# Altium PCB MicroMod_ATP_CarrierBoard.PcbDoc (part 2 of 2)
Units mil, origin at the board's own origin, x right, y up, seen from the top; angles counter-clockwise.
Board outline 3400 x 2200 mil, 2 copper layers (Top, Bottom); 222 components, 72 nets, 322 pads, 144 vias.
Unrouted connection lines stored in the file: 6.
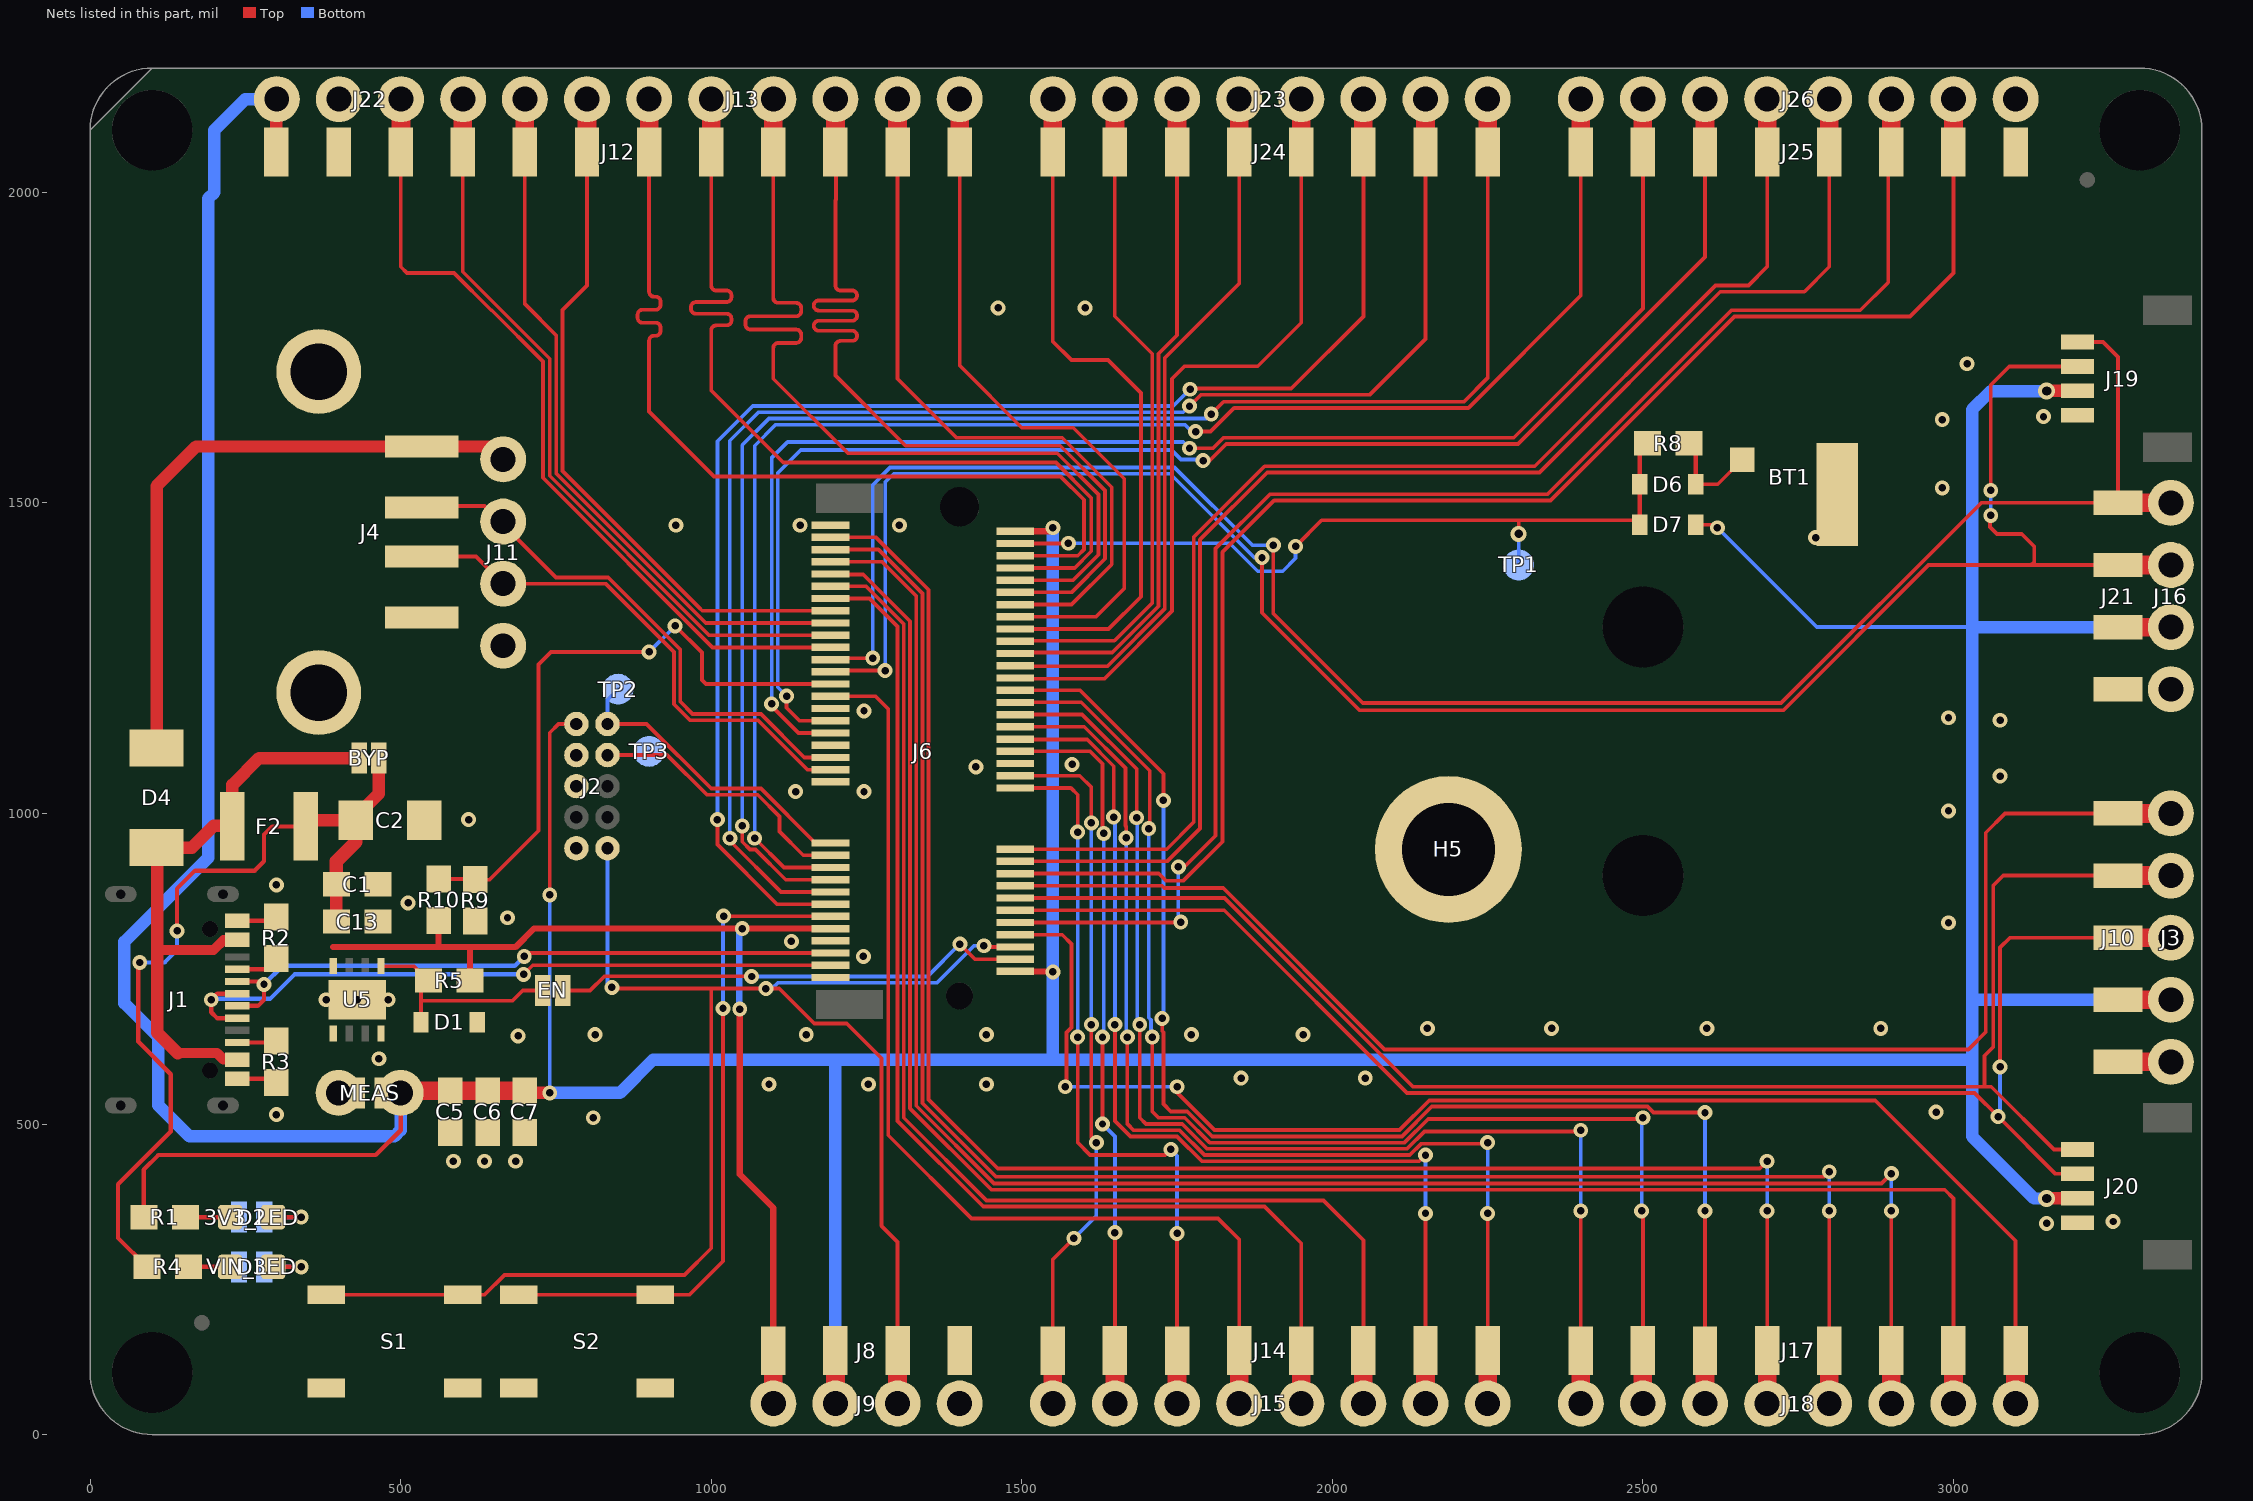
[diagram p2: the nets of this part, all layers, seen from the top]

## Part data
3V3_LED VIN_LED: library part SMT-JUMPER_2_NC_TRACE_SILK, PackageName=SMT-JUMPER_2_NC_TRACE_SILK
BT1: library part ML414H_IV01E, PackageName=ML414H_IV01E
BYP EN: library part SMT-JUMPER_2_NO_SILK, PackageName=SMT-JUMPER_2_NO_SILK
C1 C5 C6 C7 C13 R1 R2 R3 R4 R5 R8 R9 R10: library part 0603, PackageName=0603
C2: library part EIA3216, PackageName=EIA3216
D1 D6 D7: library part SOD-323, PackageName=SOD-323
D2 D3: library part LED-0603, PackageName=LED-0603
D4: library part DO-214BA, PackageName=DO-214BA
F2: library part 1210, PackageName=1210
FD1 FD2 FD3 FD4: library part FIDUCIAL-MICRO, PackageName=FIDUCIAL-MICRO
FRAME1: library part CREATIVE_COMMONS, PackageName=CREATIVE_COMMONS
H5: library part STAND-OFF-REFLOW-M2.5, PackageName=STAND-OFF-REFLOW-M2.5
J1: library part USB-C-16P-2LAYER-PADS, PackageName=USB-C-16P-2LAYER-PADS
J2: library part 2X5-PTH-1.27MM, PackageName=2X5-PTH-1.27MM
J3: library part 1X05_NO_SILK, PackageName=1X05_NO_SILK
J4: library part USB-A-S-SILK-FEMALE, PackageName=USB-A-S-SILK-FEMALE
J6: library part M.2-CONNECTOR-E, PackageName=M.2-CONNECTOR-E
J8 J21: library part 1X04_SMD_VERTICAL_COMBO, PackageName=1X04_SMD_VERTICAL_COMBO
J9 J11 J16 J22: library part 1X04_NO_SILK, PackageName=1X04_NO_SILK
J10: library part 1X05_SMD_VERTICAL_COMBO, PackageName=1X05_SMD_VERTICAL_COMBO
J12: library part 1X12_SMD_COMBINED, PackageName=1X12_SMD_COMBINED
J13 J15 J18 J23 J26: library part 1X08_NO_SILK, PackageName=1X08_NO_SILK
J14 J17 J24 J25: library part 1X08_SMD_COMBINED, PackageName=1X08_SMD_COMBINED
J19 J20: library part JST04_1MM_RA, PackageName=JST04_1MM_RA
LOGO1: library part SFE_LOGO_NAME_FLAME_.1, PackageName=SFE_LOGO_NAME_FLAME_.1
LOGO2 LOGO5 LOGO6 LOGO7 LOGO8: library part QWIIC_5MM, PackageName=QWIIC_5MM
LOGO3: library part OSHW-LOGO-MINI, PackageName=OSHW-LOGO-MINI
LOGO4: library part SFE_LOGO_NAME_FLAME_.2, PackageName=SFE_LOGO_NAME_FLAME_.2
MEAS: library part COMBO-JUMPER_2_NC_TRACE, PackageName=COMBO-JUMPER_2_NC_TRACE
S1 S2: library part TACTILE_SWITCH_SMD_5.2MM, PackageName=TACTILE_SWITCH_SMD_5.2MM
TP1 TP2 TP3: library part PAD.03X.05, PackageName=PAD.03X.05
U5: library part UDFN-8, PackageName=UDFN-8
U$1 U$123: library part #A0#10, PackageName=#A0#10
U$2 U$124: library part #A1#10, PackageName=#A1#10
U$3 U$27 U$46 U$47 U$58 U$89 U$100 U$101 U$102 U$103 U$104 U$105: library part #GND#0, PackageName=#GND#0
U$4 U$120: library part #G0#2, PackageName=#G0#2
U$5: library part #RESET10, PackageName=#RESET10
U$6 U$98: library part #D0#0, PackageName=#D0#0
U$7 U$119: library part #G1#2, PackageName=#G1#2
U$8 U$118: library part #G2#2, PackageName=#G2#2
U$9 U$117: library part #G3#3, PackageName=#G3#3
U$10 U$116: library part #G4#4, PackageName=#G4#4
U$11 U$115: library part #G5#5, PackageName=#G5#5
U$12 U$114: library part #G6#6, PackageName=#G6#6
U$13 U$113: library part #G7#7, PackageName=#G7#7
U$14 U$112: library part #G8#8, PackageName=#G8#8
U$15: library part #G9#9, PackageName=#G9#9
U$16: library part #G10#10, PackageName=#G10#10
U$17 U$111: library part #G11#10, PackageName=#G11#10
U$18 U$121: library part #PWM0#10, PackageName=#PWM0#10
U$19 U$122: library part #PWM1#10, PackageName=#PWM1#10
U$20: library part ##CS1##5178039, PackageName=##CS1##5178039
U$21 U$110: library part ##I2C_INT##10, PackageName=##I2C_INT##10
U$22: library part #CAN_RX#9, PackageName=#CAN_RX#9
U$23 U$97: library part #CAN_TX#10, PackageName=#CAN_TX#10
U$24: library part #CIPO#3, PackageName=#CIPO#3
U$25: library part #COPI#2, PackageName=#COPI#2
U$26: library part #CTS#6, PackageName=#CTS#6
U$28: library part #SCK#2, PackageName=#SCK#2
U$29: library part #I2S_FS#5, PackageName=#I2S_FS#5
U$30: library part #I2S_SDI#5, PackageName=#I2S_SDI#5
U$31: library part #I2S_SDO#5, PackageName=#I2S_SDO#5
U$32: library part #MCLK#4, PackageName=#MCLK#4
U$33: library part #RTS#5, PackageName=#RTS#5
U$34: library part #RX#8, PackageName=#RX#8
U$35: library part #TX#7, PackageName=#TX#7
U$36: library part #DAT1#5178039, PackageName=#DAT1#5178039
U$37 U$125: library part ##RESET##7, PackageName=##RESET##7
U$38 U$60 U$61 U$70 U$88 U$106 U$107 U$126: library part #3V3#1, PackageName=#3V3#1
U$39: library part #BYP#8, PackageName=#BYP#8
U$40 U$128: library part #HOST_D##9, PackageName=#HOST_D##9
U$41 U$129: library part #HOST_D##10, PackageName=#HOST_D##10
U$42 U$132: library part #MEAS#10, PackageName=#MEAS#10
U$43: library part BOOT10, PackageName=BOOT10
U$44 U$108: library part #SDA#4, PackageName=#SDA#4
U$45 U$127: library part #VIN#6, PackageName=#VIN#6
U$48: library part #EN#0, PackageName=#EN#0
U$49 U$109: library part #SCL#5, PackageName=#SCL#5
U$50 U$146: library part #VHOST#0, PackageName=#VHOST#0
U$51 U$131: library part #SWD#10, PackageName=#SWD#10
U$52: library part #I2S_CLK#5, PackageName=#I2S_CLK#5
U$53: library part #DAT2#5178039, PackageName=#DAT2#5178039
U$54: library part #CIPO1#5178039, PackageName=#CIPO1#5178039
U$55: library part 22229, PackageName=22229
U$56: library part ##CIPO1##DAT0#5178038, PackageName=##CIPO1##DAT0#5178038
U$57 U$75: library part #COPI1#2, PackageName=#COPI1#2
U$59: library part ##CS##0, PackageName=##CS##0
U$62: library part ATP0, PackageName=ATP0
U$63 U$76: library part #RX2#3, PackageName=#RX2#3
U$64 U$80: library part #TX2#2, PackageName=#TX2#2
U$65 U$78: library part #SCL1#3, PackageName=#SCL1#3
U$66 U$79: library part #SDA1#3, PackageName=#SDA1#3
U$67 U$77: library part #SCK1#2, PackageName=#SCK1#2
U$68: library part VIN3, PackageName=VIN3
U$69: library part 3V34, PackageName=3V34
U$71: library part I2C4, PackageName=I2C4
U$72: library part I2C14, PackageName=I2C14
U$73: library part ATP_CARRIER_BOARD1, PackageName=ATP_CARRIER_BOARD1
U$81: library part ##CS##5178037, PackageName=##CS##5178037
U$82: library part #DAT2#5, PackageName=#DAT2#5
U$83: library part #DAT1#5, PackageName=#DAT1#5
U$84: library part ##CS1##DAT3#5178037, PackageName=##CS1##DAT3#5178037
U$85: library part #COPI#4, PackageName=#COPI#4
U$86: library part #SCK#4, PackageName=#SCK#4
U$87: library part #MCLK#6, PackageName=#MCLK#6
U$90: library part #I2S_FS#7, PackageName=#I2S_FS#7
U$91: library part #I2S_CLK#7, PackageName=#I2S_CLK#7
U$92: library part #RTS#7, PackageName=#RTS#7
U$93: library part #CTS#8, PackageName=#CTS#8
U$94: library part #TX#9, PackageName=#TX#9
U$95: library part #RX#10, PackageName=#RX#10
U$96: library part #CAN_RX#10, PackageName=#CAN_RX#10
U$99 U$145: library part D10, PackageName=D10
U$133: library part #VIN_LED#10, PackageName=#VIN_LED#10
U$134: library part #3V3_LED#10, PackageName=#3V3_LED#10
U$135: library part #G9#ADC##CAM_HSYNC#9, PackageName=#G9#ADC##CAM_HSYNC#9
U$136: library part #G10#ADC##CAM_VSYNC#10, PackageName=#G10#ADC##CAM_VSYNC#10
U$137: library part #I2S_SDI#CAM_PCLK#7, PackageName=#I2S_SDI#CAM_PCLK#7
U$138: library part #I2S_SDO#CAM_MCLK#7, PackageName=#I2S_SDO#CAM_MCLK#7
U$139 U$141 U$142 U$143: library part MOUNT10, PackageName=MOUNT10
U$140: library part MICROMOD_MI_LOGO_1, PackageName=MICROMOD_MI_LOGO_1
U$144: library part MICROMOD_LOGO_1, PackageName=MICROMOD_LOGO_1
U$147: library part #CIPO#5178038, PackageName=#CIPO#5178038
H1 H2 H3 H4 H6 H7: PackageName=STAND-OFF

## Free pads (board coordinates)
  round 130 hole 130 unplated: MH1(100,100) MH1(100,2100) MH1(2500,900) MH1(2500,1300) MH1(3300,100) MH1(3300,2100)
  round 25.59 hole 25.59 unplated: MH1(193.11,813.78) MH2(193.11,586.22)
  round 43.31 hole 43.31 unplated: MH1(1400,706.3)
  round 62.99 hole 62.99 unplated: MH2(1400,1493.7)

## Via types
v1: diameter 24/24 (per signal layer), hole 12, Top to Bottom, 141 vias
v2: diameter 27/27 (per signal layer), hole 15, Top to Bottom, 2 vias
v3: diameter 25.78/25.78 (per signal layer), hole 13.78, Top to Bottom, 1 vias

## Nets (pads, with @x,y where several pads share a name; then routed paths per layer and width w, separated by ;. In a path a pad name is that pad's centre, name@x,y a point inside that pad or via, vN(x,y) a via of type N, cw(c..) or ccw(c..) an arc to the next point about the centre after c; other vN are vias at no path point)
3.3V: C5.1 C6.1 C7.1 D7.A J2.1 J3.4 J6.2 J6.74 J8.3 J9.2 J10.4 J12.1 J16.3 J19.2 J20.2 J21.3 J22.1 MEAS.2 MEAS.4 R1.2 | length 10630.1
  Top w6: v1(740,869) 740,1130 754,1144 J2.1@783,1144 ; D7.A@2585.28,1465 2615,1465 v1(2620,1460)
  Top w7: R1.2@86.54,350 86.54,426.54 110,450 460,450 500,490 MEAS.4@500,550 MEAS.2@470,550
  Top w10: J6.2@1489.57,745.67 1549.33,745.67 v1(1550,745) ; J6.74@1489.57,1454.33 1544.33,1454.33 v1(1550,1460)
  Top w20: J12.1@300,2064.96 300,2149.41 J22.1@300.59,2150 ; C7.1@700,553.46 703.46,550 v1(740,550) ; v2(3150,380) 3150.32,380.32 J20.2@3200,380.31 ; v2(3150,1680) 3150.32,1680.32 J19.2@3200,1680.31
  Top w30: MEAS.4@500,550 503.46,553.46 C5.1@580,553.46 C6.1@640,553.46 C7.1@700,553.46 ; J9.2@1200,50 J8.3@1200,135.04 ; J21.3@3264.96,1300 J16.3@3350,1300 ; J10.4@3265.04,700 J3.4@3350,700
  Bottom w6: v1(740,550) v1(740,869) ; v1(2620,1460) 2780,1300 3030,1300
  Bottom w20: J22.1@300.59,2150 250,2150 200,2100 200,2000 190,1990 190,928.36 55,793.36 55,694.64 110,639.64 110,530 160,480 490,480 500,490 MEAS.4@500,550 ; v1(740,550) 853,550 906.46,603.46 1200,603.46 ; J9.2@1200,50 1200,603.46 ; v1(1550,1460) v1(1550,745) 1550,603.46 ; v2(3150,380) 3130,380 3030,480 3030,603.46 ; v2(3150,1680) 3060,1680 3030,1650 3030,1300 ; J3.4@3350,700 3030,700 ; J16.3@3350,1300 3030,1300 ; 1200,603.46 1550,603.46 ; 1550,603.46 3030,603.46 ; 3030,603.46 3030,700 ; 3030,700 3030,1300
3.3V_EN: D1.C EN.1 R5.1 U5.5 | length 364.9
  Top w6: U5.5@468.39,754.13 521.4,754.13 R5.1@537.77,737.77 ; D1.C@532.72,664 532.72,698 ; R5.1@544.54,731 R5.1@537.77,737.77 ; EN.1@729,715 696.68,715 680,698.32 533.04,698.32 532.72,698 ; 532.72,698 532.72,732.72 R5.1@537.77,737.77
!BOOT!: J6.11 S2.3 S2.4 | length 1079.8
  Top w6: S2.4@690,225 S2.3@910,225 965,225 1019,279 v1(1019,686) ; v1(1020,834.57) 1192.01,834.57 J6.11@1192.32,834.25
  Bottom w6: v1(1019,686) 1019,833.57 v1(1020,834.57)
!CS1!/DAT3: J6.70 J12.7 J13.6 | length 1625
  Top w6: J12.7@900,2050 900,1840 ccw(c908,1840) 908,1832 910.51,1832 cw(c910.51,1824) 918.51,1824 918.51,1819.03 cw(c910.51,1819.03) 910.51,1811.03 889.49,1811.03 ccw(c889.49,1803.03) 881.49,1803.03 881.49,1798.06 ccw(c889.49,1798.06) 889.49,1790.06 910.51,1790.06 cw(c910.51,1782.06) 918.51,1782.06 918.51,1777.1 cw(c910.51,1777.1) 910.51,1769.1 908,1769.1 ccw(c908,1761.1) 900,1761.1 900,1647 1004.5,1542.5 1562.5,1542.5 1600,1505 1600,1425 1589.96,1414.96 J6.70@1489.57,1414.96 ; J12.7@900,2064.96 J13.6@900,2150
  Top w30: J12.7@900,2050 J13.6@900,2150
!CS!: J6.55 J12.3 J22.3 | length 1411.3
  Top w6: J12.3@500,2050 500,1880 510,1870 585.86,1870 645.86,1810 646.72,1810 729,1727.72 729,1540.46 1002.13,1267.32 J6.55@1192.32,1267.32 ; J12.3@500,2064.96 500,2149.41 J22.3@500.59,2150
  Top w30: J12.3@500,2050 500.59,2050.59 J22.3@500.59,2150
!RESET: J2.10 J6.6 J8.2 J9.3 S1.3 S1.4 | length 2874.9
  Top w6: S1.4@380,225 S1.3@600,225 635.1,225 667.1,257 957,257 1000,300 1000,718 ; v1(840,720) 842,718 1000,718 ; J8.2@1300,135.04 1300,150 1300,310 1274,336 1274,606 1218.1,661.9 1165.8,661.9 1109.7,718 v1(1088,718) 1000,718 ; v1(1439,787) 1440.96,785.04 J6.6@1489.57,785.04
  Top w20: J9.3@1300,50 J8.2@1300,150
  Top w30: J9.3@1300,50 J8.2@1300,135.04
  Bottom w6: J2.10@833,944 833,727 v1(840,720) ; v1(1088,718) 1098,718 1107.51,727.51 1363.51,727.51 1423,787 v1(1439,787)
A0: J6.34 J14.8 J15.8 | length 1154.6
  Top w6: J6.34@1489.57,1060.63 1593.51,1060.63 1612.07,1042.07 1612.07,984.84 v1(1612,984.77) ; J14.8@1550,134.96 1550,282 v1(1584,316) ; v1(1612,660) 1612,478 v1(1620,470)
  Top w30: J15.8@1550,50 J14.8@1550,134.96
  Bottom w6: v1(1584,316) 1620,352 v1(1620,470) ; v1(1612,660) v1(1612,984.77)
A1: J6.38 J14.7 J15.7 | length 1188.7
  Top w6: J6.38@1489.57,1100 1610,1100 1630,1080 1630,970 v1(1632,968) ; v1(1630,500) v1(1630,640) ; J14.7@1650,135.04 v1(1650,325)
  Top w30: J15.7@1650,50 J14.7@1650,135.04
  Bottom w6: v1(1630,500) 1650,480 v1(1650,325) ; v1(1630,640) 1632,642 v1(1632,968)
CAN_RXI: J6.41 J25.2 J26.2 | length 2446.8
  Top w6: v1(1097.26,1176.26) 1095.5,1174.5 1140.47,1129.53 J6.41@1192.32,1129.53 ; v1(1770,1588) 1808,1588 1824.88,1604.88 2292.03,1604.88 2500,1812.86 J25.2@2500,2050 ; J25.2@2500,2064.96 J26.2@2500,2150
  Top w30: J25.2@2500,2050 J26.2@2500,2150
  Bottom w6: v1(1097.26,1176.26) 1097.26,1572.26 1123,1598 1760,1598 v1(1770,1588)
CAN_TXO: J6.43 J25.3 J26.3 | length 2453.6
  Top w6: v1(1121.26,1189) 1121.26,1170 1142.04,1149.21 J6.43@1192.32,1149.21 ; v1(1791.88,1568.12) 1801.88,1568.12 1802.07,1567.93 1829.03,1594.88 2299.03,1594.88 2600,1895.86 J25.3@2600,2050 ; J25.3@2600,2064.96 J26.3@2600,2150
  Top w30: J25.3@2600,2050 J26.3@2600,2150
  Bottom w6: v1(1121.26,1189) 1107.26,1203 1107.26,1548 1144.26,1585 1741.28,1585 1756.28,1570 1790,1570 v1(1791.88,1568.12)
CIPO: J6.61 J12.6 J13.7 | length 1140
  Top w6: J12.6@800,2065.04 800,1850 760.45,1810.45 760.45,1551.43 980.94,1330.94 985.5,1326.38 J6.61@1192.32,1326.38
  Top w30: J12.6@800,2065.04 J13.7@800,2150
CIPO1/DAT0: J6.64 J12.10 J13.3 | length 1625.6
  Top w6: J12.10@1200,2050 1200.79,2049.21 1200.79,1988.19 1200,1987.4 1200,1850 ccw(c1208,1850) 1208,1842 1226.87,1842 cw(c1226.87,1834) 1234.87,1834 1234.87,1833.77 cw(c1226.87,1833.77) 1226.87,1825.77 1173.13,1825.77 ccw(c1173.13,1817.77) 1165.13,1817.77 1165.13,1817.53 ccw(c1173.13,1817.53) 1173.13,1809.53 1226.87,1809.53 cw(c1226.87,1801.53) 1234.87,1801.53 1234.87,1801.3 cw(c1226.87,1801.3) 1226.87,1793.3 1173.13,1793.3 ccw(c1173.13,1785.3) 1165.13,1785.3 1165.13,1785.06 ccw(c1173.13,1785.06) 1173.13,1777.06 1226.87,1777.06 cw(c1226.87,1769.06) 1234.87,1769.06 1234.87,1768.83 cw(c1226.87,1768.83) 1226.87,1760.83 1208,1760.83 ccw(c1208,1752.83) 1200,1752.83 1200,1705 1313,1592 1562,1592 1634,1520 1634,1410 1579.91,1355.91 J6.64@1489.57,1355.91 ; J12.10@1200,2065.04 J13.3@1200,2150
  Top w30: J12.10@1200,2050 J13.3@1200,2150
COPI: J6.59 J12.5 J13.8 | length 1165.1
  Top w6: J12.5@700,2064.96 700,1820 750.45,1769.55 750.45,1547.29 991.05,1306.69 J6.59@1192.32,1306.69
  Top w30: J12.5@700,2064.96 J13.8@700,2150
COPI1: J6.62 J12.11 J13.2 | length 1258.8
  Top w6: J12.11@1300,2050 1300,1700 1395,1605 1565,1605 1645,1525 1645,1401 1580.22,1336.22 J6.62@1489.57,1336.22 ; J12.11@1300,2064.96 J13.2@1300,2150
  Top w30: J12.11@1300,2050 J13.2@1300,2150
CTS1: J6.15 J23.7 J24.7 | length 2499.4
  Top w6: v1(1030,960) 1030,956 1112.38,873.62 J6.15@1192.32,873.62 ; v1(1770,1655.88) 1788,1673.88 2059.88,1673.88 2150,1764 J24.7@2150,2050 ; J24.7@2150,2064.96 J23.7@2150,2150
  Top w30: J24.7@2150,2050 J23.7@2150,2150
  Bottom w6: v1(1030,960) 1030,1600 1076,1646 1760.12,1646 v1(1770,1655.88)
D0: J6.10 J25.6 J26.6 | length 2458.1
  Top w6: J6.10@1489.57,824.41 1755.41,824.41 v1(1756,825) ; v1(1752,914) 1762,914 1812,964 1812,1426.43 1899.57,1514 2346.57,1514 2642.57,1810 2850,1810 2895,1855 2895,2060.04 J25.6@2900,2065.04
  Top w30: J25.6@2900,2065.04 J26.6@2900,2150
  Bottom w6: v1(1752,914) 1752,829 v1(1756,825)
D1: J6.18 J25.7 J26.7 | length 2475.1
  Top w6: J6.18@1490.79,901.93 J6.18@1489.57,903.15 1720.54,903.15 1731.85,891.85 1760.3,891.85 1823,954.54 1823,1420.72 1906.28,1504 2351.28,1504 2647.28,1800 2930,1800 3000,1870 J25.7@3000,2064.96
  Top w30: J25.7@3000,2064.96 J26.7@3000,2150
DAT1: J6.66 J12.9 J13.4 | length 1625.1
  Top w6: J12.9@1100,2050 1100,1830 ccw(c1108,1830) 1108,1822 1136.81,1822 cw(c1136.81,1814) 1144.81,1814 1144.81,1808.53 cw(c1136.81,1808.53) 1136.81,1800.53 1063.19,1800.53 ccw(c1063.19,1792.53) 1055.19,1792.53 1055.19,1787.05 ccw(c1063.19,1787.05) 1063.19,1779.05 1136.81,1779.05 cw(c1136.81,1771.05) 1144.81,1771.05 1144.81,1765.58 cw(c1136.81,1765.58) 1136.81,1757.58 1108,1757.58 ccw(c1108,1749.58) 1100,1749.58 1100,1700 1220,1580 1557,1580 1623.5,1513.5 1623.5,1416.5 1582.59,1375.59 J6.66@1489.57,1375.59 ; J12.9@1100,2064.96 J13.4@1100,2150
  Top w30: J12.9@1100,2050 J13.4@1100,2150
DAT2: J6.68 J12.8 J13.5 | length 1624.9
  Top w6: J12.8@1000,2050 1000,1850 ccw(c1008,1850) 1008,1842 1024.55,1842 cw(c1024.55,1834) 1032.55,1834 1032.55,1831.26 cw(c1024.55,1831.26) 1024.55,1823.26 975.45,1823.26 ccw(c975.45,1815.26) 967.45,1815.26 967.45,1812.51 ccw(c975.45,1812.51) 975.45,1804.51 1024.55,1804.51 cw(c1024.55,1796.51) 1032.55,1796.51 1032.55,1793.77 cw(c1024.55,1793.77) 1024.55,1785.77 1008,1785.77 ccw(c1008,1777.77) 1000,1777.77 1000,1681 1116,1565 1555,1565 1612,1508 1612,1422 1585.28,1395.28 J6.68@1489.57,1395.28 ; J12.8@1000,2065.04 J13.5@1000,2150
  Top w30: J12.8@1000,2050 J13.5@1000,2150
G0: J6.40 J14.2 J15.2 | length 1679.5
  Top w6: J6.40@1489.57,1119.69 1490.35,1118.91 1605.24,1118.91 1648,1076.14 v1(1648,994) ; v1(1650,660) 1650,505 1675,480 1750,480 1790,440 2140,440 v1(2150,450) ; J14.2@2150,135.04 v1(2150,356.14)
  Top w30: J15.2@2150,50 J14.2@2150,135.04
  Bottom w6: v1(1648,994) 1650,992 v1(1650,660) ; v1(2150,356.14) v1(2150,450)
G1: J6.42 J14.1 J15.1 | length 1893.5
  Top w6: J6.42@1489.57,1139.37 1489.79,1139.59 1600.69,1139.59 1667,1073.28 1667,980 1668,979 v1(1668,960.52) ; v1(1670,640) 1670,500 1680,490 1754.14,490 1794.14,450 2124.54,450 2142.54,468 2248,468 v1(2250,470) ; J15.1@2250,50 J14.1@2250,135.04 ; J14.1@2250,123 v1(2250,356.14)
  Top w30: J15.1@2250,50 J14.1@2250,123
  Bottom w6: v1(1668,960.52) 1668,642 v1(1670,640) ; v1(2250,356.14) v1(2250,470)
G2: J6.44 J17.8 J18.8 | length 1978.5
  Top w6: J6.44@1489.57,1159.06 1489.79,1159.28 1597.15,1159.28 1685,1071.43 v1(1685,993) ; v1(1690,660) 1690,510 1700,500 1758.28,500 1798.28,460 2120.4,460 2148.4,488 2398,488 v1(2400,490) ; J17.8@2400,134.96 v1(2400,360)
  Top w30: J18.8@2400,50 J17.8@2400,134.96
  Bottom w6: v1(1685,993) 1686,992 1686,664 v1(1690,660) ; v1(2400,360) v1(2400,490)
G3: J6.46 J17.7 J18.7 | length 2102.8
  Top w6: J6.46@1489.57,1178.74 1489.79,1178.96 1595.61,1178.96 1706,1068.57 1706,977.23 v1(1704.38,975.62) ; v1(1710,640) 1710,520 1720,510 1762.43,510 1802.43,470 2116.26,470 2154.26,508 2498,508 v1(2500,510) ; v1(2498,360) 2500,358 J17.7@2500,135.04
  Top w30: J18.7@2500,50 J17.7@2500,135.04
  Bottom w6: v1(1704.38,975.62) 1704.38,671.07 1708,667.46 1708,642 v1(1710,640) ; v1(2498,360) 2498,508 v1(2500,510)
G4: J6.48 J17.6 J18.6 | length 2213.6
  Top w6: J6.48@1489.57,1198.43 1593.57,1198.43 1728,1064 v1(1728,1021) ; v1(1726,670) 1726,649.46 1728,647.46 1728,532 1740,520 1766.57,520 1806.57,480 2112.12,480 2160.12,528 2507.46,528 2516.99,518.46 v1(2600,518.46) ; J17.6@2600,134.96 v1(2600,360)
  Top w30: J18.6@2600,50 J17.6@2600,134.96
  Bottom w6: v1(1726,670) 1728,672 v1(1728,1021) ; v1(2600,360) v1(2600,518.46)
G5: J6.73 J17.5 J18.5 | length 2804.1
  Top w6: J6.73@1192.32,1444.49 1265.51,1444.49 1350,1360 1350,539.57 1461.28,428.28 2688.28,428.28 v1(2700,440) ; J17.5@2700,135.04 v1(2700,360)
  Top w30: J18.5@2700,50 J17.5@2700,135.04
  Bottom w6: v1(2700,360) v1(2700,440)
G6: J6.71 J17.4 J18.4 | length 2883.3
  Top w6: J6.71@1192.32,1424.8 1192.54,1425.02 1269.12,1425.02 1340,1354.14 1340,533.43 1458.28,415.14 2792,415.14 v1(2800,423.14) ; J17.4@2800,134.96 v1(2800,360)
  Top w30: J18.4@2800,50 J17.4@2800,134.96
  Bottom w6: v1(2800,360) v1(2800,423.14)
G7: J6.69 J17.3 J18.3 | length 2979.6
  Top w6: J6.69@1192.32,1405.12 1274.88,1405.12 1330,1350 1330,529.28 1455.14,404.14 2884.14,404.14 v1(2900,420) ; J17.3@2900,135.04 v1(2900,360)
  Top w30: J18.3@2900,50 J17.3@2900,135.04
  Bottom w6: v1(2900,360) v1(2900,420)
G8: J6.67 J17.2 J18.2 | length 3013.5
  Top w6: J6.67@1192.32,1385.43 1193.1,1384.65 1244.63,1384.65 1320,1309.28 1320,525.14 1451.14,394 2986,394 3000,380 J17.2@3000,135.04
  Top w30: J18.2@3000,50 J17.2@3000,135.04
G9/ADC_N: J6.65 J14.3 J15.3 | length 2022.5
  Top w6: J6.65@1192.32,1365.75 1249.39,1365.75 1310,1305.14 1310,510 1443,377 1986,377 2050,313 J14.3@2050,135.04
  Top w30: J15.3@2050,50 J14.3@2050,135.04
G10/ADC_P: J6.63 J14.4 J15.4 | length 1911.9
  Top w6: J6.63@1192.32,1346.06 1254.94,1346.06 1300,1301 1300,505 1438,367 1891,367 1950,308 J14.4@1950,134.96
  Top w30: J15.4@1950,50 J14.4@1950,134.96
G11: J6.8 J17.1 J18.1 | length 2270.4
  Top w6: J6.8@1489.57,804.72 1565.28,804.72 1580,790 1580,655.46 1572,647.46 1572,562 v1(1570,560) ; v1(1750,560) 1750,550.71 1810.36,490.36 2108.33,490.36 2155.98,538 2874.14,538 3100,312.14 J17.1@3100,135.04
  Top w30: J18.1@3100,50 J17.1@3100,135.04
  Bottom w6: v1(1570,560) v1(1750,560)
GND: 3V3_LED.2 BT1.- C1.2 C2.- C5.2 C6.2 C7.2 C13.2 D1.A H5.1 J1.GND J1.GND2 J2.3 J2.5 J2.9 J3.5 J4.GND J4.SHLD1 J4.SHLD2 J6.1 J6.7 J6.33 J6.36 J6.39 J6.45 J6.75 J8.1 J9.4 J10.5 J11.4 J12.2 J16.4 J19.1 J20.1 J21.4 J22.2 J25.8 J26.8 R2.1 R3.1 R9.1 S1.1 S1.2 S2.1 S2.2 U5.4 U5.EP VIN_LED.2 | length 217.2
  Top w7: J1.GND2@236.61,573.03 293.5,573.03 R3.1@300,566.54 ; J1.GND@236.61,826.97 293.5,826.97 R2.1@300,833.46
  Top w30: J10.5@3264.96,600 J3.5@3350,600
  other v1: 3150,340 3257,343 585,440 635,440 685,440 810,510 300,515 2972,519 1093,564 1253,564 1443,564 1853,574 2053,574 465,605 689,642 813,644 1153,644 1443,644 1773,644 1953,644 2153,654 2353,654 2603,654 2883,654 380,700 430,700 480,700 1245,770 1129,794 2992,824 672,832 512,856 300,885 609.37,990 2992,1004 1136,1035 1246,1035 3075,1060 1426,1075 1581,1079 3075,1150 2992,1154 1246,1165 2778,1444 943,1464 1143,1464 1303,1464 2982,1524 2982,1634 3145,1639 3022,1724 1462,1814 1602,1814
I2C_!INT: J3.1 J6.16 J10.1 | length 2315
  Top w6: J6.16@1489.57,883.46 1726.09,883.46 1729.78,879.78 1824.37,879.78 2084.14,620 3024,620 3052,648 3052,969 3083,1000 J10.1@3264.96,1000
  Top w30: J10.1@3264.96,1000 J3.1@3350,1000
I2S_CLK: J6.50 J23.5 J24.5 | length 1277.5
  Top w6: J6.50@1489.57,1218.11 1490.79,1216.89 1633.03,1216.89 1742,1325.86 1742,1700 1762,1720 1880,1720 1950,1790 J24.5@1950,2064.96
  Top w30: J24.5@1950,2064.96 J23.5@1950,2150
I2S_SDI: J6.54 J23.3 J24.3 | length 1175.8
  Top w6: J6.54@1489.57,1257.48 1491.35,1259.26 1645.54,1259.26 1720,1333.72 1720,1740 1750,1770 J24.3@1750,2050 ; J24.3@1750,2064.96 J23.3@1750,2150
  Top w30: J24.3@1750,2050 J23.3@1750,2150
I2S_SDO: J6.56 J23.2 J24.2 | length 1167.3
  Top w6: J6.56@1489.57,1277.17 1490.35,1277.94 1649.09,1277.94 1710,1338.86 1710,1740 1649.61,1800.39 J24.2@1649.61,2050 ; J24.2@1650,2064.96 J23.2@1650,2150
  Top w30: J24.2@1649.61,2050 1650,2050.39 J23.2@1650,2150
I2S_WS: J6.52 J23.4 J24.4 | length 1234.5
  Top w6: J6.52@1489.57,1237.8 1490.36,1237 1638,1237 1730,1329 1730,1733 1850,1853 J24.4@1850,2050 ; J24.4@1850,2065.04 J23.4@1850,2150
  Top w30: J24.4@1850,2050 J23.4@1850,2150
MCLK: J6.58 J23.1 J24.1 | length 1203.5
  Top w6: J6.58@1489.57,1296.85 1639.85,1296.85 1692,1349 1692,1677 1639,1730 1580,1730 1550,1760 J24.1@1550,2050 ; J24.1@1550,2064.96 J23.1@1550,2150
  Top w30: J24.1@1550,2050 J23.1@1550,2150
N$1: D2.A R1.1 | length 72
  Top w7: R1.1@153.46,350 D2.A@225.47,350
N$2: D3.A R4.1 | length 67
  Top w7: R4.1@158.46,270 D3.A@225.47,270
N$3: 3V3_LED.1 D2.C | length 105
  Top w7: D2.C@294.53,350 v1(340,350)
  Bottom w7: 3V3_LED.1@280.5,350 v1(340,350)
N$4: D3.C VIN_LED.1 | length 105
  Top w7: D3.C@294.53,270 v1(340,270)
  Bottom w7: VIN_LED.1@280.5,270 v1(340,270)
N$5: EN.2 J6.4 | length 770
  Top w6: EN.2@761,715 805,715 828,738 1064.51,738 v1(1065,737.51) ; v1(1400.27,789.73) 1424.65,765.35 J6.4@1489.57,765.35
  Bottom w6: v1(1065,737.51) 1348.06,737.51 v1(1400.27,789.73)
N$6: 
N$7: D4.C J4.VBUS J11.1 | length 1014.8
  Top w20: D4.C@107,1105.24 107,1527 170.8,1590.8 J4.VBUS@533.94,1590.8 644.2,1590.8 J11.1@665,1570
N$10: J1.A5 R2.2 | length 70.6
  Top w7: J1.A5@236.61,749.21 282.68,749.21 R2.2@300,766.54
N$11: J1.B5 R3.2 | length 64.4
  Top w7: J1.B5@236.61,631.1 297.64,631.1 R3.2@300,633.46
N$14: BT1.+ D6.A R8.1 | length 161.6
  Top w6: D6.A@2585.28,1530 2620.39,1530 BT1.+@2660,1569.61
  Top w7: R8.1@2574.46,1596 2585.28,1585.19 D6.A@2585.28,1530
OUT_MEAS: MEAS.1 MEAS.3 U5.1 | length 30
  Top w7: MEAS.3@400,550 MEAS.1@430,550
PWM0: J6.32 J14.6 J15.6 | length 1240.1
  Top w6: J6.32@1489.57,1040.94 1579.06,1040.94 1590,1030 v1(1590,970) ; v1(1590,640) 1590,470 1610,450 1731,450 v1(1740,459) ; J14.6@1750,134.96 v1(1750,324)
  Top w30: J15.6@1750,50 J14.6@1750,134.96
  Bottom w6: v1(1590,640) v1(1590,970) ; v1(1740,459) 1750,449 v1(1750,324)
PWM1: J6.47 J14.5 J15.5 | length 1685.9
  Top w6: J6.47@1192.32,1188.58 1264.42,1188.58 1285,1168 1285,481.86 1418.86,348 1816,348 1850,314 J14.5@1850,135.04
  Top w30: J15.5@1850,50 J14.5@1850,135.04
RTC_3V: D6.C D7.C J6.72 R8.2 TP1.P$1 | length 1282.4
  Top w6: J6.72@1489.57,1434.65 1574.65,1434.65 v1(1575,1435) ; v1(1940.77,1430) 1982.77,1472 2300,1472 ; v3(2300,1450) 2300,1472 ; D7.C@2494.72,1465 2487.72,1472 2300,1472
  Top w7: D7.C@2494.72,1465 D6.C@2494.72,1530 2494.72,1578.26 2510,1593.54 R8.2@2507.54,1596
  Bottom w6: v1(1575,1435) 1835,1435 1880,1390 1920,1390 1940.77,1410.77 v1(1940.77,1430) ; TP1.P$1@2300,1400 v3(2300,1450)
RTS1: J6.13 J23.6 J24.6 | length 2344.4
  Top w6: v1(1010,990) 1010,950 1106.06,853.94 J6.13@1192.32,853.94 ; v1(1771,1683) 1772,1684 1934,1684 2050,1800 J24.6@2050,2065.04
  Top w30: J24.6@2050,2065.04 J23.6@2050,2150
  Bottom w6: v1(1010,990) 1010,1599.14 1066.86,1656 1744,1656 v1(1771,1683)
RX1: J6.19 J25.1 J26.1 | length 2614.4
  Top w6: v1(1070,960) 1117.01,912.99 J6.19@1192.32,912.99 ; v1(1779.88,1614.88) 1803.88,1614.88 1841.88,1652.88 2219,1652.88 2400,1833.88 J25.1@2400,2050 ; J25.1@2400,2064.96 J26.1@2400,2150
  Top w30: J25.1@2400,2050 J26.1@2400,2150
  Bottom w6: v1(1070,960) 1070,1592.14 1103.86,1626 1762.46,1626 1773.57,1614.88 v1(1779.88,1614.88)
RX2: J6.20 J25.5 J26.5 | length 2334.4
  Top w6: J6.20@1489.57,922.83 1734,922.83 1787,975.83 1787,1440.86 1895.14,1549 2333.43,1549 2624.43,1840 2760,1840 2800,1880 J25.5@2800,2050 ; J25.5@2800,2064.96 J26.5@2800,2150
  Top w30: J25.5@2800,2050 J26.5@2800,2150
SCK: J6.57 J12.4 J22.4 | length 1307.6
  Top w6: J12.4@600,2050 600,1872 739.91,1732.09 739.91,1543.69 991.8,1291.8 996.59,1287.01 J6.57@1192.32,1287.01 ; J12.4@600,2065.04 J22.4@600,2149.41
  Top w30: J12.4@600,2050 600,2149.41 J22.4@600.59,2150
SCK1: J6.60 J12.12 J13.1 | length 1225.6
  Top w6: J12.12@1400,2050 1400,1721 1500,1621 1583,1621 1665,1539 1665,1362 1619.54,1316.54 J6.60@1489.57,1316.54 ; J12.12@1400,2065.04 J13.1@1400,2150
  Top w30: J12.12@1400,2050 J13.1@1400,2150
SCL: J3.2 J6.14 J10.2 J20.4 | length 2500.5
  Top w6: J6.14@1489.57,863.78 1826.22,863.78 2130,560 3050,560 ; J20.4@3200,459.06 3161.68,459.06 3060.73,560 3050,560 ; J10.2@3264.96,900 3080,900 3064,884 3064,624 3050,610 3050,560
  Top w30: J10.2@3264.96,900 J3.2@3350,900
SCL1: J6.53 J16.1 J19.4 J21.1 | length 3199.1
  Top w6: J6.53@1192.32,1247.64 1194.69,1250 v1(1260,1250) ; v1(1905,1432) 1905,1322 2049.06,1177.94 2722.54,1177.94 3044.59,1500 J21.1@3264.96,1500 ; J19.4@3200,1759.06 3240.94,1759.06 3264.96,1735.04 J21.1@3264.96,1500
  Top w30: J21.1@3264.96,1500 J16.1@3350,1500 J21.1@3264.96,1500
  Bottom w6: v1(1260,1250) 1260,1529 1288,1557 1746,1557 1871,1432 v1(1905,1432)
SDA: J3.3 J6.12 J10.3 J20.3 | length 2441.1
  Top w6: J6.12@1489.57,844.09 1825.91,844.09 2120,550 3034,550 v1(3072,512) 3164.32,419.69 J20.3@3200,419.69 ; v1(3075,592) 3075,784 3091,800 J10.3@3264.96,800
  Top w30: J10.3@3264.96,800 J3.3@3350,800
  Bottom w6: v1(3072,512) 3075,515 v1(3075,592)
SDA1: J6.51 J16.2 J19.3 J21.2 | length 3358.9
  Top w6: J6.51@1192.32,1227.95 1194.37,1230 v1(1280,1230) ; v1(1886.77,1412) 1886.77,1323.23 2044.06,1165.94 2725.94,1165.94 2960,1400 3125,1400 ; v1(3060,1480) 3059,1481 3059,1461 3070,1450 3110,1450 3130,1430 3130,1405 3125,1400 ; v1(3060,1520) 3060,1690 3089.69,1719.69 J19.3@3200,1719.69 ; J21.2@3250,1400 3125,1400
  Top w30: J21.2@3250,1400 J16.2@3350,1400 J21.2@3264.96,1400
  Bottom w6: v1(1280,1230) 1280,1533.14 1293.86,1547 1739.14,1547 1874.14,1412 v1(1886.77,1412) ; v1(3060,1480) v1(3060,1520)
SWDCK: J2.4 J6.21 TP3.P$1 | length 509.8
  Top w6: J2.4@833,1094 929,1094 993,1030 1075,1030 1110,995 1110,970.86 1148.18,932.68 J6.21@1192.32,932.68
  Bottom w6: J2.4@833,1094 894,1094 TP3.P$1@900,1100
SWDIO: J2.2 J6.23 TP2.P$1 | length 501.7
  Top w6: J2.2@833,1144 896,1144 1000,1040 1080,1040 1167.64,952.36 J6.23@1192.32,952.36
  Bottom w6: J2.2@833,1144 833,1183 TP2.P$1@850,1200
TX1: J6.17 J23.8 J24.8 | length 2499.9
  Top w6: v1(1050,980) 1050,954.54 1062.54,942 1071.31,942 1120,893.31 J6.17@1192.32,893.31 ; v1(1805,1642.88) 1825,1662.88 2212,1662.88 2250,1700.88 J24.8@2250,2065.04
  Top w30: J24.8@2250,2065.04 J23.8@2250,2150
  Bottom w6: v1(1050,980) 1050,1593 1093,1636 1797.54,1636 1804.43,1642.88 v1(1805,1642.88)
TX2: J6.22 J25.4 J26.4 | length 2137.6
  Top w6: J6.22@1489.57,942.52 1733.52,942.52 1777,986 1777,1445 1891,1559 2326,1559 2617,1850 2670,1850 2700,1880 J25.4@2700,2065.04
  Top w30: J25.4@2700,2065.04 J26.4@2700,2150
USB_N: J1.A7 J1.B7 J6.5 | length 1050.8
  Top w6: v1(699,770) 704.2,775.2 J6.5@1192.32,775.2
  Top w7: J1.A7@236.61,690.16 270.16,690.16 280,700 v1(280,724.88) 275.35,729.53 J1.B7@236.61,729.53
  Bottom w7: v1(280,724.88) 310,754.88 683.88,754.88 v1(699,770)
USB_P: J1.A6 J1.B6 J6.3 | length 1131.6
  Top w6: v1(698,741) 712.51,755.51 J6.3@1192.32,755.51
  Top w7: J1.B6@236.61,670.47 204.53,670.47 195,680 v1(195,700) 204.84,709.84 J1.A6@236.61,709.84
  Bottom w7: v1(195,700) 196.38,701.38 289.73,701.38 329.23,740.88 697.88,740.88 v1(698,741)
USBHOST_N: J4.D- J6.37 J11.2 | length 881.4
  Top w6: J4.D-@533.94,1492.37 536.57,1495 635,1495 J11.2@660,1470 ; J11.2@665,1470 J11.2@660,1470 ; J6.37@1192.32,1090.16 1149.84,1090.16 1080,1160 970,1160 950,1180 950,1264.14 834.14,1380 750,1380 J11.2@660,1470
USBHOST_P: J4.D+ J6.35 J11.3 | length 849.8
  Top w6: J4.D+@533.94,1413.63 621.37,1413.63 J11.3@665,1370 830,1370 940,1260 940,1175.86 965.86,1150 1075.26,1150 1154.79,1070.47 J6.35@1192.32,1070.47
V_USB: BYP.1 D4.A F2.1 J1.VBUS1 J1.VBUS2 | length 1005.7
  Top w16: 108,780 198.64,780 215.1,796.46 J1.VBUS1@236.61,796.46 ; 140.98,614.02 204.62,614.02 215.1,603.54 J1.VBUS2@236.61,603.54
  Top w20: 140.98,614.02 108,647 108,780 108,944 D4.A@107,945 164,945 199,980 F2.1@228.94,980 ; F2.1@228.94,979 F2.1@228.94,980 ; BYP.1@433,1089 272,1089 228.94,1045.94 F2.1@228.94,980
VIN: BYP.2 C1.1 C2.+ C13.1 F2.2 J6.9 J8.4 J9.1 R4.2 R5.2 R10.2 U5.8 | length 3184.5
  Top w7: v1(80,760) 77.5,757.5 77.5,632.75 130,580.25 130,488 45,403 45,316.54 R4.2@91.54,270 ; v1(140,810.98) 140,878.98 169.02,908 265,908 280,923 280,966 293,979 F2.2@347.06,979
  Top w10: 391.61,785 560,785 ; R10.2@561,827.54 561,786 560,785 ; R5.2@611.46,731 611.46,783.54 610,785 ; v1(1046,685) 1046,418.96 1100,364.96 1100,150 J8.4@1100,134.96 ; J6.9@1192.32,814.57 v1(1050,814.57) 714.57,814.57 685,785 610,785 ; 560,785 610,785
  Top w20: F2.2@347.06,979 357.06,989 C2.+@427.88,989 427.88,994.88 465,1032 BYP.2@465,1089 ; C13.1@396.54,826 C1.1@396.54,886
  Top w22: C1.1@396.54,886 396.54,923 427.88,954.35 C2.+@427.88,989
  Top w30: J8.4@1100,134.96 J9.1@1100,50 J8.4@1100,150
  Bottom w7: v1(80,760) 120,760 140,780 v1(140,810.98)
  Bottom w10: v1(1046,685) 1045,686 1045,809.57 v1(1050,814.57)
VIN/3: J6.49 R9.2 R10.1 | length 1022.5
  Top w6: R10.1@561,894.46 619,894.46 R9.2@620,893.46 643.46,893.46 722,972 722,1240 742,1260 v1(900,1260) ; v1(942,1302) 985,1259 985,1215 991.73,1208.27 J6.49@1192.32,1208.27
  Bottom w6: v1(900,1260) v1(942,1302)
pads on no net: FD1.1 FD2.1 FD3.1 FD4.1 J1.A8 J1.B8 J1.SHLD1 J1.SHLD2 J1.SHLD3 J1.SHLD4 J2.6 J2.7 J2.8 J6.A1 J6.A2 J19.NC1 J19.NC2 J20.NC1 J20.NC2 U5.2 U5.3 U5.6 U5.7

## Polygon pours and split planes (outlines as drawn)
GND on Top "Polygon_2_Net_GND" (solid, remove dead copper, pour order 3): -3.5,2203.5 3404.13,2203.5 3404.13,-3.5 -3.5,-3.5
OUT_MEAS on Top "Polygon_1_Net_OUT_MEAS" (solid, remove dead copper, pour order 1): 385,659 398,659 398,629.41 421,606.41 421,519 379,519 379,622.41 385,628.41
VIN on Top "Polygon_1_Net_VIN" (solid, remove dead copper, pour order 0): 385,741 398,741 398,770.81 419,791.81 419,851 375,851 375,773.59 385,763.59
GND on Bottom "Polygon_1_Net_GND" (solid, remove dead copper, pour order 2): -3.5,2203.5 3404.13,2203.5 3404.13,-3.5 -3.5,-3.5

## Keep-outs
Keep-Out Layer:
  the board outline again, w8

## Other copper
Bottom:
  text "v11" at 354.53,20.26 h42.5

## Silkscreen, mask and mechanical layers (free items; w line width, h text height)
Dimension:
  the board outline again, w8
tDocu:
  text "Elias Santistevan" at 1870,-630 h59.5
tPlace:
  circle w0: c782,1206 r20
  lines w8: 1493,668 2186.57,668 2187.57,1533 1498,1533
  text "-" at 2798,1621 h108.5
  text "+" at 2638,1604 h108.5
bPlace:
  circle w0: c782,1206 r20

## Dimensions
3300.63,0 to 0,0 on tFinish
0,2200 to 0,0 on tFinish

## Text inside footprints (layer, text, board x,y; h text height)
FRAME1: tDocu "Designed by:" at 1260,-620 h59.5; tDocu "https://creativecommons.org/licenses/by-sa/4.0/" at 810,-520 h59.5; tDocu "Released under the Creative Commons Attribution Share-Alike 4.0 License" at 10,-420 h59.5